# Altium PCB nRF53_Module.PcbDoc
Units mm, origin at the board's own origin, x right, y up, seen from the top; angles counter-clockwise.
Board outline 13.97 x 19.56 mm, 4 copper layers (Top Layer, Int1 (GND), Int2 (SIGN), Bottom Layer), stack 0.97 mm thick; 25 components, 66 nets, 202 pads, 80 vias.
Unrouted connection lines stored in the file: 1.
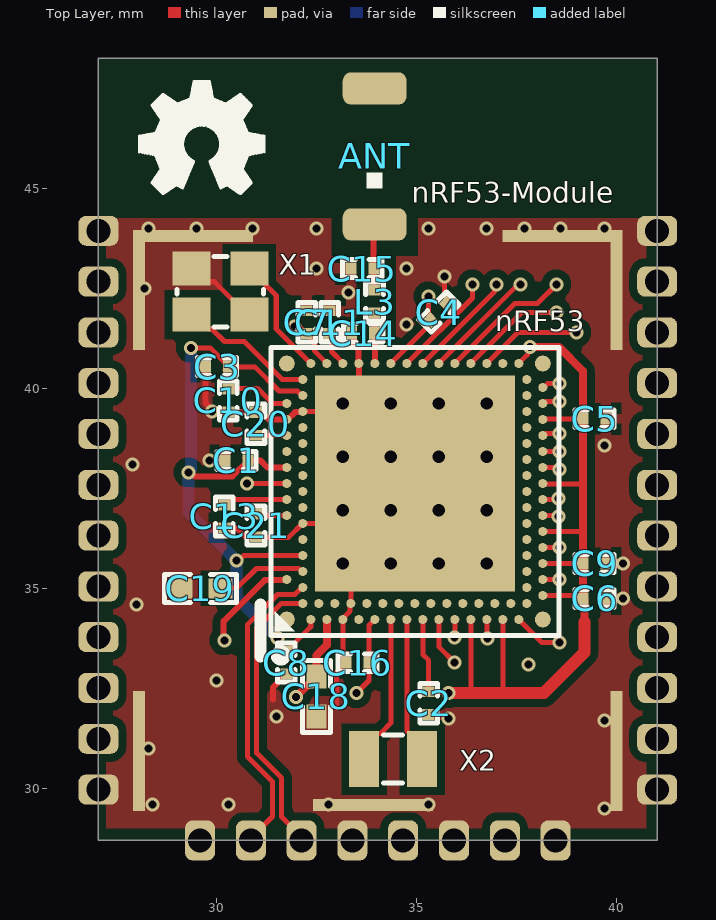
[diagram p0: Top Layer view]
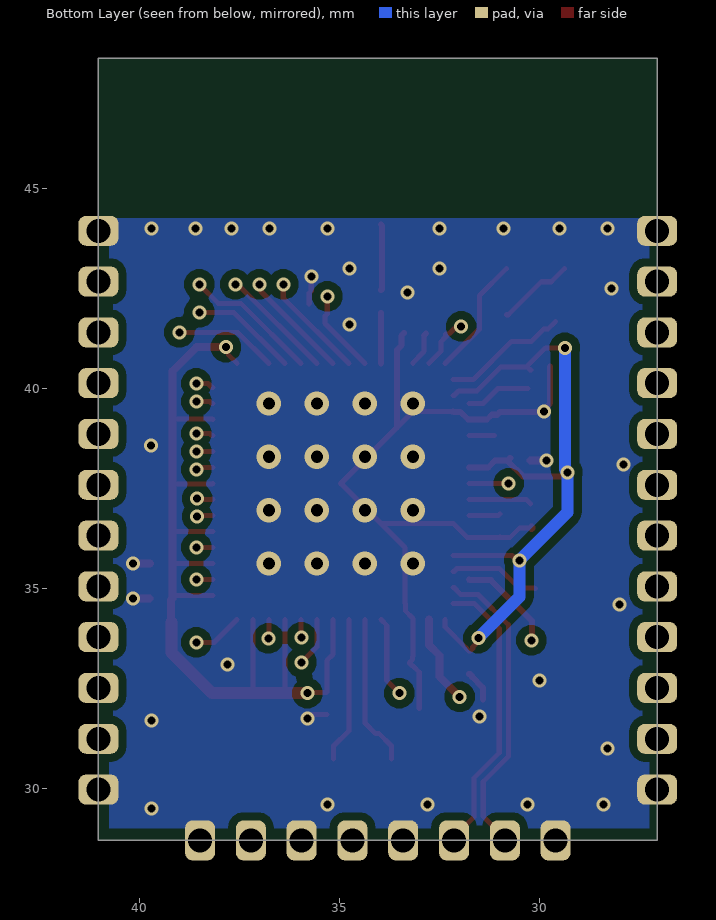
[diagram p1: Bottom Layer view, seen from below]
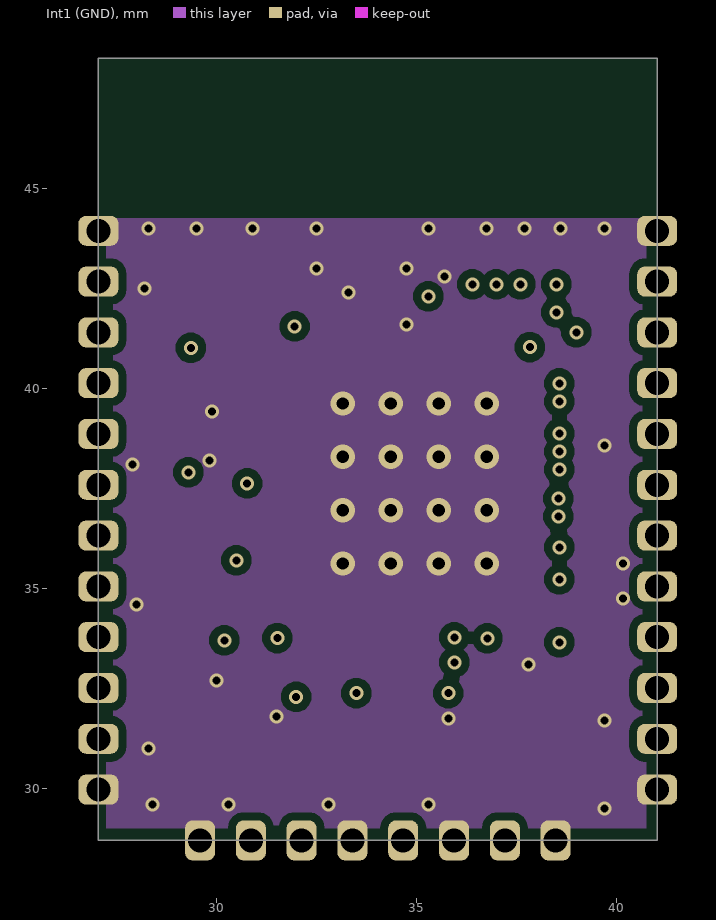
[diagram p2: Int1 (GND)]
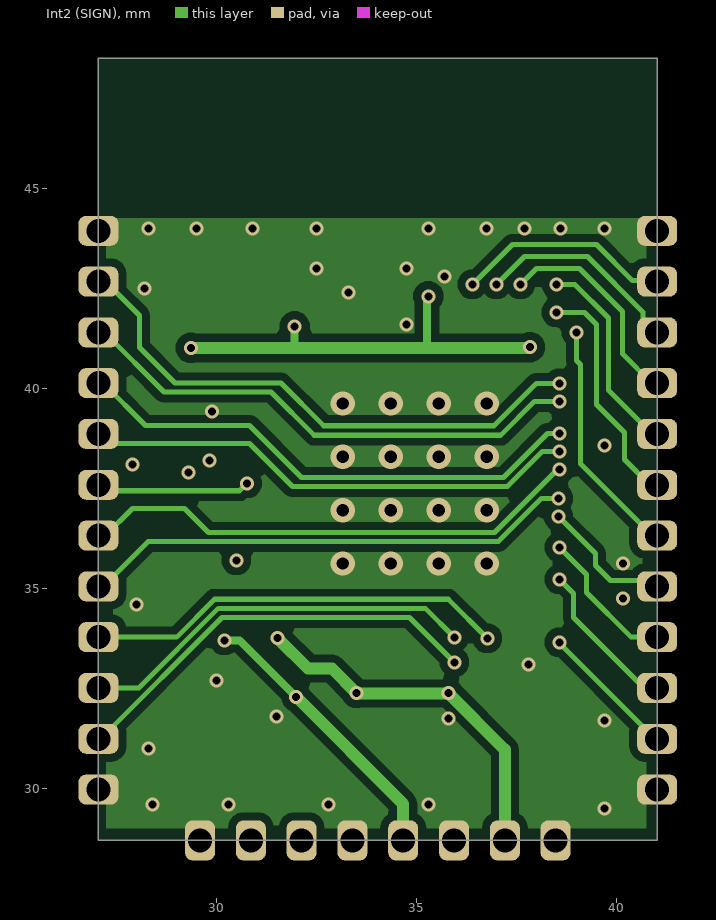
[diagram p3: Int2 (SIGN)]
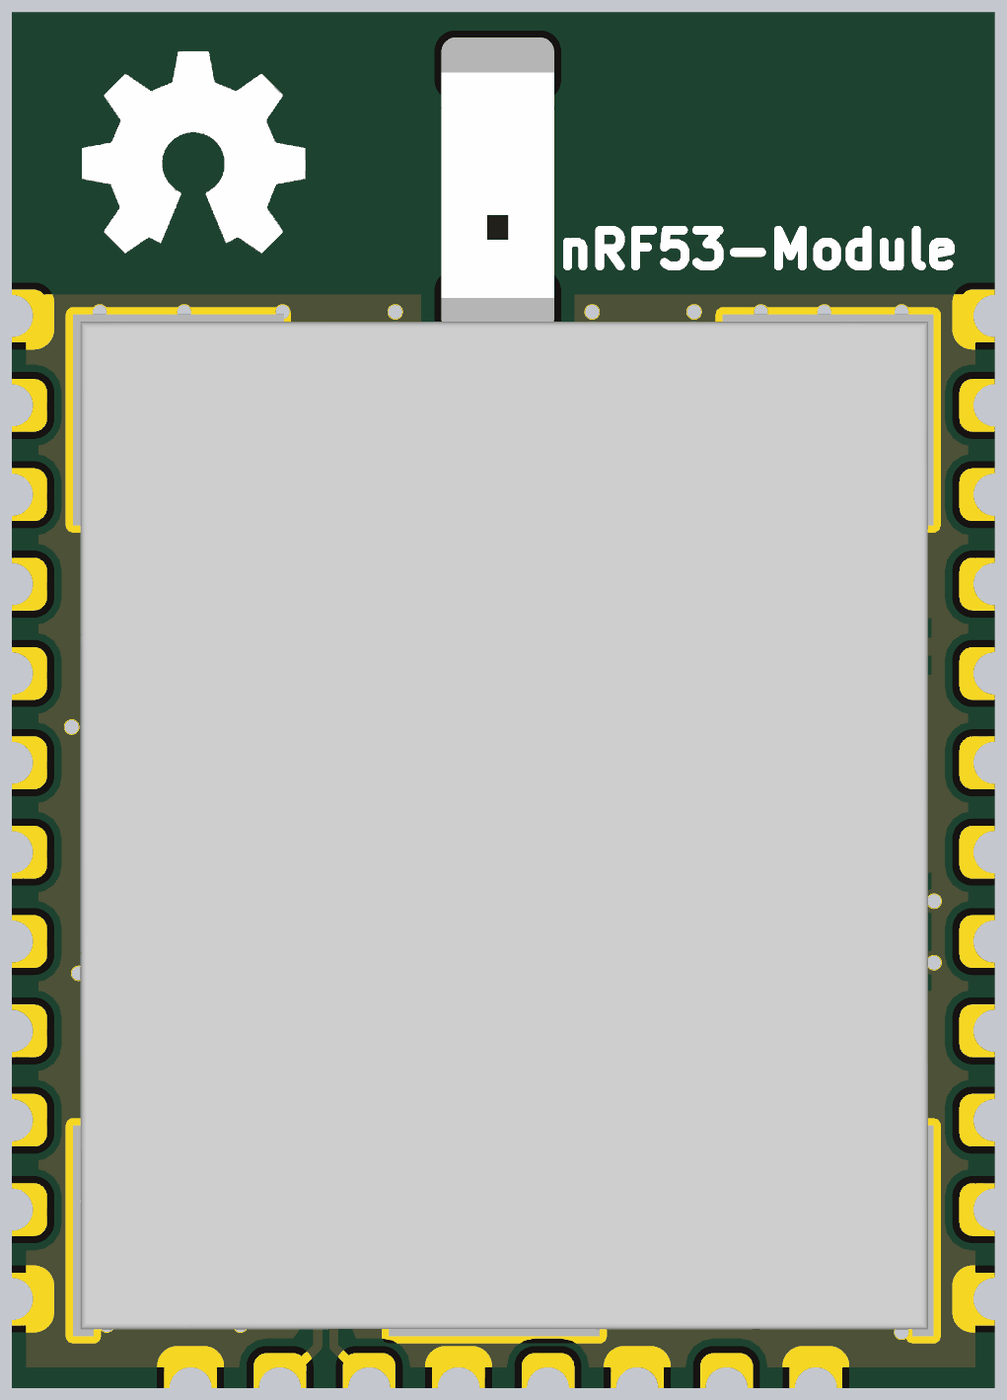
[diagram p4: 3D render of the assembled board from above, using the file's embedded part models]

## Layer stack, top to bottom
Top Solder: solder mask 0.0254, SM-001, Dk 4
Top Layer: signal copper 0.035
Dielectric 1: prepreg 0.1, PP-017, Dk 4.3
Int1 (GND): signal copper 0.0175
Dielectric 3: core 0.665, Core-039, Dk 4.8
Int2 (SIGN): signal copper 0.0175
Dielectric 5: prepreg 0.1, PP-017, Dk 4.3
Bottom Layer: signal copper 0.035
Bottom Solder: solder mask 0.0254, SM-001, Dk 4

## Board outline
27.051,28.702 41.021,28.702 41.021,48.26 27.051,48.26

## Design rules (kind name [scope] priority, off if disabled: settings)
Clearance poly [InPoly] p1: gap=0.2 ignorepadtopadclearanceinfootprint=TRUE
Clearance ALL [All] p2: gap=0.1 ignorepadtopadclearanceinfootprint=TRUE
ComponentClearance [All] p1 off: gap=0.254 collisioncheckmode=3 verticalgap=0.254 showdistances=FALSE
DiffPairsRouting [InDifferentialPair('DiffPair')] p1: maxlimit=0.254 minlimit=0.089 mostfreqgap=0.2 toplayer_minwidth=0.089 toplayer_maxwidth=0.381 toplayer_prefwidth=0.15 midlayer1_minwidth=0.089 midlayer1_maxwidth=0.381 midlayer1_prefwidth=0.15 midlayer2_minwidth=0.089 midlayer2_maxwidth=0.381 midlayer2_prefwidth=0.15 bottomlayer_minwidth=0.089 bottomlayer_maxwidth=0.381 bottomlayer_prefwidth=0.15 maxuncoupledlength=12.7
HoleSize [All] p1 off: absolutevalues=TRUE maxlimit=2.54 minlimit=0.025 maxpercent=80.000 minpercent=20.000
HoleToHoleClearance [All] p1: gap=0.254 allowstackedmicrovias=FALSE
MatchedLengths usb [InDifferentialPair('USB')] p1: tolerance=1 checknetsindiffpair=FALSE checkdiffpairvsdiffpair=TRUE checkxsignals=TRUE checkothers=TRUE
MinimumAnnularRing [IsVia] p1: minimumring=0.076
MinimumSolderMaskSliver [All] p1 off: minsoldermaskwidth=0.254
PlaneConnect [InNet('NetC11_2')] p1: planeconnectstyle=Direct reliefexpansion=0.508 reliefentries=4 reliefconductorwidth=0.254 reliefairgap=0.254
PolygonConnect 0201 [HasFootprint('C0201')] p1: connectstyle=Relief reliefconductorwidth=0.254 reliefentries=4 polygonreliefangle="90 Angle" airgapwidth=0.254
PolygonConnect [All] p2: connectstyle=Direct reliefconductorwidth=0.254 reliefentries=4 polygonreliefangle="90 Angle" airgapwidth=0.254
RoutingVias [All] p1: holewidth=0.2 width=0.4 viastyle="Through Hole" minholewidth=0.1 minwidth=0.2 maxholewidth=6.3 maxwidth=1.27
SilkToSilkClearance [All] p1 off: silktosilkclearance=0.254
SilkToSolderMaskClearance [IsPad] p1 off: minsilkscreentomaskgap=0.254 clearancetoexposedcopper=TRUE
SolderMaskExpansion via [isvia] p1: expansion=0.102 istentingtop=TRUE
SolderMaskExpansion [All] p2: expansion=0.102 istentingtop=FALSE
Width [All] p1: maxlimit=1 minlimit=0.081 preferedwidth=0.15
22 further rules are at their usual default settings.

## Classes and differential pairs
differential pair USB: +USB_P -USB_N

## Components (designator, comment, footprint, x,y, rotation, side; value= is the part's Value field where it differs from the comment)
ANT "AMCA31-2R450G-S1F-T3" AMCA31-2R450G-S1F-T3 33.958,44.1 r0 top locked value=2450AT18D0100
C1 "1uF" C0201 30.5,38.2 r0 top value=100pF
C2 "100nF" C0201 35.306,32.131 r90 top value=100pF
C3 "100nF" C0201 30.015,40.548 r0 top value=100pF
C4 "100nF" C0201 35.56,41.91 r225 top value=100pF
C5 "100nF" C0201 39.453,39.243 r180 top value=100pF
C6 "100nF" C0201 39.453,34.75 r180 top value=100pF
C7 "100nF" C0201 32.258,41.656 r270 top value=100pF
C8 "100nF" C0201 31.75,33.147 r90 top value=100pF
C9 "100nF" C0201 39.453,35.624 r180 top value=100pF
C10 "1uF" C0201 30.3,39.7 r90 top value=100pF
C11 "2.2nF" C0201 32.833,41.657 r270 top value=100pF
C13 "1uF" C0201 30.2,36.8 r90 top value=100pF
C14 "1.5pF" C0201 33.669,41.386 r0 top locked value=100pF
C15 "DNP" C0201 33.647,42.999 r0 top value=100pF
C16 "2.2uF" C0201 33.528,33.147 r0 top value=100pF
C18 "4.7uF" C0402 32.5,32.3 r90 top value=100pF
C19 "4.7uF" C0402 29.6,35 r0 top value=100pF
C20 "100nF" C0201 30.988,39.116 r270 top value=100pF
C21 "1uF" C0201 30.988,36.576 r90 top value=100pF
L3 "3.9nH" IND0201 33.954,42.17 r90 top locked value=120R/0.55A
nRF53 "nRF5340-QKAA" nRF5340 34.96,37.424 r90 top locked
nRF53-Module "nRF5340-Module" NRF53MODULE 27.051,32.512 r0 top locked
X1 "ABM11-32.000MHZ-D2X-T3" XTAL_2016 30.099,42.418 r180 top value=32MHz
X2 "ABS06-32.768KHZ-T" XTAL_2012 34.417,30.734 r180 top value=32.768kHz

## Footprints (in the part's own frame and the unit in brackets; to place one, negate y for a bottom-side part, rotate by r counter-clockwise, add the part's x,y. Pads: shape width x height; smd on the part's side, far side on the other; paste and mask are expansions set on the pad)
AMCA31-2R450G-S1F-T3 [mm] "Chip antenna 2.45Ghz"
  rrect50% 1.6x0.8 smd: 1(0,0) NC(0,3.4)
  silkscreen extent -0.2,0.9 0.2,1.3, body extent -0.8,0.1 0.8,3.3, height 1.4
C0201 [mm]
  rect 0.27x0.3 smd: 1(-0.285,0) 2(0.285,0)
  silkscreen extent -0.49,-0.22 0.49,0.22, body extent -0.3,-0.15 0.31,0.15, height 0.3
C0402 [mm]
  rect 0.6x0.5 smd: 1(-0.5,0) 2(0.5,0)
  silkscreen extent -0.9,-0.35 0.9,0.35, body extent -0.51,-0.25 0.51,0.25, height 0.5
IND0201 [mm]
  rect 0.27x0.3 smd: 1(-0.285,0) 2(0.285,0)
  silkscreen extent -0.49,-0.22 0.49,0.22, body extent -0.31,-0.16 0.31,0.16, height 0.26
NRF53MODULE [mm] "Module"
  rrect50% 1x0.75 hole 0.6: 1(0,11.43) 2(0,10.16) 3(0,8.89) 4(0,7.62) 5(0,6.35) 6(0,5.08) 7(0,3.81) 8(0,2.54) 9(0,1.27) 10(0,0) 11(0,-1.27) 12(0,-2.54) 13(13.97,-2.54) 14(13.97,-1.27) 15(13.97,0) 16(13.97,1.27) 17(13.97,2.54) 18(13.97,3.81) 19(13.97,5.08) 20(13.97,6.35) 21(13.97,7.62) 22(13.97,8.89) 23(13.97,10.16) 24(13.97,11.43)
  rect 0.3x3 smd: 1(1.016,-1.571) 1(1.016,9.953) 1(12.954,-1.571) 1(12.954,9.953)
  rect 3x0.3 smd: 1(2.366,11.303) 1(6.858,-2.921) 1(11.604,11.303)
  rrect50% 0.75x1 hole 0.6: 25(2.54,-3.81) 26(3.81,-3.81) 27(5.08,-3.81) 28(6.35,-3.81) 29(7.62,-3.81) 30(8.89,-3.81) 31(10.16,-3.81) 32(11.43,-3.81)
  body extent 0.97,-2.97 13.03,11.35, height 1
nRF5340 [mm] "Nordic Semiconductor"
  rect 5.4x5 smd paste-5 mask+0.05: 104(0.2,0)
  round 0.4 smd paste+0.012 mask+0.05: A1(-3.2,3.2) A31(3.2,3.2) AL1(-3.2,-3.2) AL31(3.2,-3.2)
  round 0.225 smd paste+0.012 mask+0.05: A5(-2.2,3.2) A13(-0.6,3.2) A15(-0.2,3.2) A17(0.2,3.2) A19(0.6,3.2) A21(1,3.2) A23(1.4,3.2) A25(1.8,3.2) A27(2.2,3.2) AA1(-3.2,-1) AA31(3.2,-1) AB2(-2.8,-1.2) AC1(-3.2,-1.4) AC31(3.2,-1.4) AD2(-2.8,-1.6) AE1(-3.2,-1.8) AE31(3.2,-1.8) AF2(-2.8,-2) AG1(-3.2,-2.2) AG31(3.2,-2.2) AH2(-2.8,-2.4) AJ1(-3.2,-2.6) AJ31(3.2,-2.6) AK2(-2.8,-2.8) AK4(-2.4,-2.8) AK6(-2,-2.8) AK8(-1.6,-2.8) AK10(-1.2,-2.8) AK12(-0.8,-2.8) AK14(-0.4,-2.8) AK16(0,-2.8) AK18(0.4,-2.8) AK20(0.8,-2.8) AK22(1.2,-2.8) AK24(1.6,-2.8) AK26(2,-2.8) AK28(2.4,-2.8) AK30(2.8,-2.8) AL3(-2.6,-3.2) AL5(-2.2,-3.2) AL7(-1.8,-3.2) AL9(-1.4,-3.2) AL11(-1,-3.2) AL13(-0.6,-3.2) AL15(-0.2,-3.2) AL17(0.2,-3.2) AL19(0.6,-3.2) AL21(1,-3.2) AL23(1.4,-3.2) AL25(1.8,-3.2) AL27(2.2,-3.2) AL29(2.6,-3.2) B2(-2.8,2.8) B4(-2.4,2.8) B6(-2,2.8) B8(-1.6,2.8) B10(-1.2,2.8) B12(-0.8,2.8) B14(-0.4,2.8) B16(0,2.8) B18(0.4,2.8) B20(0.8,2.8) B22(1.2,2.8) B24(1.6,2.8) B26(2,2.8) B28(2.4,2.8) B30(2.8,2.8) C1(-3.2,2.6) C31(3.2,2.6) D2(-2.8,2.4) E1(-3.2,2.2) E31(3.2,2.2) F2(-2.8,2) G1(-3.2,1.8) G31(3.2,1.8) H2(-2.8,1.6) J1(-3.2,1.4) J31(3.2,1.4) K2(-2.8,1.2) L1(-3.2,1) L31(3.2,1) M2(-2.8,0.8) N1(-3.2,0.6) N31(3.2,0.6) P2(-2.8,0.4) R1(-3.2,0.2) R31(3.2,0.2) T2(-2.8,0) U1(-3.2,-0.2) U31(3.2,-0.2) V2(-2.8,-0.4) W1(-3.2,-0.6) W31(3.2,-0.6) Y2(-2.8,-0.8)
  rrect50% 1.1x1 on Top Paste: ""(-1.75,-1.8) ""(-1.75,-0.6) ""(-1.75,0.6) ""(-1.75,1.8) ""(-0.45,1.8) ""(-0.45,-0.6) ""(-0.45,0.6) ""(-0.45,-1.8) ""(0.85,1.8) ""(0.85,-0.6) ""(0.85,0.6) ""(0.85,-1.8) ""(2.15,-1.8) ""(2.15,-0.6) ""(2.15,0.6) ""(2.15,1.8)
  silkscreen extent -4.22,-3.6 3.6,3.6, body extent -3.5,-3.5 3.5,3.5, height 0.85
XTAL_2012 [mm]
  rect 0.75x1.4 smd: 1(-0.725,0) 2(0.725,0)
  silkscreen extent -0.24,-0.6 0.24,0.6, body extent -1,-0.61 1,0.61, height 0.6
XTAL_2016 [mm]
  rect 0.95x0.85 smd: 1(-0.725,-0.575) 2(0.725,-0.575) 3(0.725,0.575) 4(-0.725,0.575)
  silkscreen extent -1.08,-0.88 1.08,0.88, body extent -1.05,-0.85 1.05,0.85, height 0.56

## Part data
ANT: library part "Antenna with GND", "2.45 GHz chip antenna", manufacturer="Johanson Technology", Manufacturer Part Number=2450AT18D0100, Part Number="Johanson 2450AT18D0100_STD-L", Part number IPS=N.A., Supplier Part Number 1=2450AT18D0100E, Artikkelnr Noca=53059035, ComponentLink1Description=Datasheet, ComponentLink2Description="Supplier link", Footprint Doc=2450AT18D0100, HelpURL=http://www.johansontechnology.com/datasheets/antennas/2450AT18D0100.pdf, LatestRevisionDate=2016-06-02, Pin Count=4, Published=2016-01-12, Publisher="Nordic Semiconductor", Supplier 1=Digi-Key, Supplier 2=Mouser, Supplier Part Number 2=609-2450AT18D0100E
C1 C2 C3 C4 C5 C6 C7 C8 C9 C10 C11 C13 C14 C15 C16 C18 C19 C20 C21: library part CAP, "Capacitor", Published=8-Jun-2000, Publisher="Altium Limited", Revision="July-2002: Re-released for DXP Platform."
L3: library part IND, "Inductor", manufacturer=Murata, Manufacturer Part Number=BLM15AG121SN1D, Part Number=FB0402-120R@100M-500mA, Part number IPS=N.A., Artikkelnr Noca=33029317, ComponentLink1Description=Datasheet, ComponentLink2Description="Supplier link", Footprint Doc=0402, HelpURL=http://search.murata.co.jp/Ceramy/image/img/PDF/ENG/L0110S0100BLM15A_SN.pdf, LatestRevisionDate=2014-01-10, Note="Chip EMIFIL Inductor Type Chip Ferrite Bead", Pin Count=2, Published=2011-11-14, Publisher="Nordic Semiconductor"
nRF53: library part nRF5340-QKAAAA, "Multi-protocol Bluetooth Low Energy, IEEE 802.15.4, ANT and 2.4GHz proprietary system-on-chip", manufacturer="Nordic Semiconductor", Part Number=nRF5340-QKAADA, Part number IPS=N.A., Artikkelnr Noca=N.A., ComponentLink1Description=Datasheet, ComponentLink2Description="Supplier link", Footprint Doc=AQFN-98, LatestRevisionDate=2019-03-28, Pin Count=98, Published=2017-01-09, Publisher="Nordic Semiconductor", Supplier 1="Nordic Semiconductor", Supplier Part Number 1=nRF5340-QKAADA
nRF53-Module: "nRF5340-Module Available on https://www.hackster.io/kattemjau"
X1: library part XTAL_SMD2016, "XTAL SMD 2016, 32MHz, Cl=8pF, Total Tol: ±40ppm", Part Number=XTAL_SMD2016_32MHz_8pF_General, Footprint Doc=XTAL_2016, LatestRevisionDate=2016-08-19, Pin Count=4, Published=2016-08-19, Publisher="Nordic Semiconductor"
X2: library part XTAL_2-pin, "XTAL SMD 32.768kHz, 9pF, ±20ppm", manufacturer=NDK, Manufacturer Part Number=NX3215SA-32.768K-STD-MUA-9, Part Number=XTAL_SMD3215_32.768kHz_9pF_NDK, Part number IPS=N.A., Supplier Part Number 1=535-11937-6-ND, Artikkelnr Noca=22010049, ComponentLink1Description=Datasheet, ComponentLink2Description="Supplier link", Footprint Doc=XTAL_3215, LatestRevisionDate=2017-10-23, Note="XTAL SMD 32.768kHz", Pin Count=2, Published=2017-10-23, Publisher="Nordic Semiconductor", Supplier 1=Digi-Key

## Via types
v1: diameter 0.35, hole 0.2, Top Layer to Bottom Layer, tented both sides, 64 vias
v2: diameter 0.61, hole 0.305, Top Layer to Bottom Layer, tented both sides, 16 vias

## Nets (pads, with @x,y where several pads share a name; then routed paths per layer and width w, separated by ;. In a path a pad name is that pad's centre, name@x,y a point inside that pad or via, vN(x,y) a via of type N, cw(c..) or ccw(c..) an arc to the next point about the centre after c; other vN are vias at no path point)
EPROM_CS: nRF53.AK14
GND: C1.1 C2.1 C3.1 C4.1 C5.1 C6.1 C7.1 C8.1 C9.1 C10.1 C11.1 C13.1 C14.1 C15.1 C16.1 C18.1 C19.1 C20.1 C21.1 nRF53-Module.1 nRF53-Module.12 nRF53-Module.13 nRF53-Module.24 nRF53-Module.25 nRF53-Module.28 nRF53-Module.30 nRF53-Module.32 nRF53.104 nRF53.A25 nRF53.B12 nRF53.B26 nRF53.G1 nRF53.H2 nRF53.J31 X1.2 X1.4 | length 25.3
  Top Layer w0.127: X1.2 29.699,42.668 29.949,42.668 30.774,41.843 X1.4 ; C13.1 30.491,36.515 30.729,36.278 C21.1@30.988,36.278 ; C21.1 31.001,36.278 31.806,36.278 32.152,36.624 nRF53.B12 nRF53.104@33.96,36.624 ; nRF53.B26 33.16,39.424 nRF53.104@33.56,39.024 ; 33,32 33,32.904 33.157,33.061 33.172,33.061 33.243,33.132 C16.1 33.172,33.219 33.172,33.296 33.16,33.308 nRF53.G1 33.16,34.25 33.341,34.431 33.341,34.605 nRF53.H2 33.36,36.024 nRF53.104@33.96,36.624 ; nRF53.104 nRF53.104@33.96,36.624 ; C2.1 35.651,31.846 35.747,31.75 v1(35.796,31.75) ; v1(35.7,42.8) 35.7,42.434 35.751,42.384 35.751,42.122 C4.1 ; nRF53-Module.30 nRF53-Module.30@35.941,28.827
  Top Layer w0.152: C3.1 29.73,39.633 29.885,39.477 v1(29.885,39.424) ; v1@29.835,39.424 29.844,39.415 C10.1 30.307,39.408 30.981,39.408 C20.1 ; C20.1@30.988,39.407 31.053,39.342 31.189,39.342 31.307,39.224 nRF53.A25 31.78,39.224 31.966,39.41 32.146,39.41 nRF53.B26 ; 31.41,32.222 31.41,32.522 31.676,32.788 31.676,32.803 31.735,32.862 C8.1 ; C14.1 33.443,41.327 33.443,41.075 33.554,40.965 33.554,40.63 nRF53.J31 33.56,39.024 nRF53.104
  Top Layer w0.2: v1(29.825,38.2) C1.1 ; C13.1@30.193,36.522 C13.1 ; C9.1 40.159,35.624 v1(40.16,35.625) ; C6.1@39.745,34.75 39.746,34.751 39.95,34.751
  other v1: 39.7,29.5 28.4,29.6 30.3,29.6 32.8,29.6 35.3,29.6 28.3,31 39.7,31.7 31.5,31.8 30,32.7 37.8,33.1 28,34.6 40.16,34.751 27.9,38.1 39.704,38.568 34.75,41.6 33.3,42.4 28.2,42.5 32.5,43 34.75,43 28.3,44 29.5,44 30.9,44 32.5,44 35.3,44 36.75,44 37.7,44 38.6,44 39.7,44
  other v2: 33.16,35.624 34.36,35.624 35.56,35.624 36.76,35.624 33.16,36.957 34.36,36.957 35.56,36.957 36.76,36.957 33.16,38.29 34.36,38.29 35.56,38.29 36.76,38.29 33.16,39.624 34.36,39.624 35.56,39.624 36.76,39.624
NetANT_1: ANT.1 C15.2 L3.2 | length 1.7
  Top Layer w0.15: L3.2 33.932,42.477 33.932,44.073 ANT.1
NetC10_2: C10.2 nRF53.A27 | length 1.6
  Top Layer w0.127: C10.2@30.28,40 31.032,40 31.409,39.624 nRF53.A27
NetC11_2: C11.2 nRF53.G31 | length 0.9
  Top Layer w0.127: C11.2@32.88,41.325 32.88,40.923 33.16,40.643 nRF53.G31
  Top Layer w0.152: C11.2 C11.2@32.88,41.325
NetC13_2: C13.2 nRF53.A15 | length 1.6
  Top Layer w0.127: C13.2@30.217,37.115 30.226,37.124 30.326,37.224 nRF53.A15
NetC14_2: C14.2 L3.1 nRF53.L31 | length 1.3
  Top Layer w0.15: C14.2 33.959,41.382 nRF53.L31 nRF53.L31 ; C14.2 L3.1
NetC19_2: C19.2 nRF53.B6 | length 2.3
  Top Layer w0.127: C19.2 30.116,35.016 30.516,35.016 31,35.5 32.057,35.5 32.133,35.424 nRF53.B6
NetC20_2: C20.2 nRF53.A23 | length 0.6
  Top Layer w0.127: C20.2@31.115,38.824 nRF53.A23
NetC21_2: C21.2 nRF53.A13 | length 0.8
  Top Layer w0.127: C21.2 31.025,36.824 nRF53.A13
NetnRF53_B30: nRF53.B30 X1.3 | length 3.2
  Top Layer w0.127: X1.3@29.591,41.676 29.786,41.481 29.892,41.481 30.203,41.171 30.698,41.171 31.646,40.224 nRF53.B30
NetnRF53_C31: nRF53.C31 X1.1 | length 3
  Top Layer w0.127: X1.1 31.496,42.321 31.496,41.488 nRF53.C31
NetnRF53_N1: nRF53.N1 X2.2 | length 3.8
  Top Layer w0.127: X2.2 33.692,31.059 34.004,31.371 34.094,31.371 34.36,31.636 nRF53.N1
NetnRF53_R1: nRF53.R1 X2.1 | length 3.6
  Top Layer w0.127: nRF53.R1 34.76,31.441 35.142,31.059 X2.1
P0.02: nRF53-Module.11 nRF53.W1 | length 11.9
  Top Layer w0.127: nRF53.W1 35.56,33.54 v1(35.95,33.15)
  Int2 (SIGN) w0.127: nRF53-Module.11 27.109,31.242 30.142,34.275 34.825,34.275 v1(35.95,33.15)
P0.03: nRF53-Module.10 nRF53.AA1 | length 10.5
  Top Layer w0.127: v1(35.95,33.775) 35.96,33.785 nRF53.AA1
  Int2 (SIGN) w0.127: nRF53-Module.10 28.058,32.512 30.048,34.502 35.223,34.502 v1(35.95,33.775)
P0.04: nRF53.V2
P0.05: nRF53.Y2
P0.06: nRF53.AB2
P0.07: nRF53.AD2
P0.08: nRF53.AH2
P0.09: nRF53-Module.14 nRF53.AJ1 | length 4.7
  Top Layer w0.127: nRF53.AJ1 38.134,33.65 v1(38.575,33.65)
  Int2 (SIGN) w0.127: v1(38.575,33.65) 38.575,33.63 40.963,31.242 nRF53-Module.14
P0.10: nRF53.AK2
P0.12: nRF53.AK6
P0.19: nRF53-Module.17 nRF53.AL13 | length 3.8
  Top Layer w0.127: nRF53.AL13 38.527,36.824 v1(38.552,36.799)
  Int2 (SIGN) w0.127: v1(38.552,36.799) 39.475,35.876 39.475,35.575 39.85,35.2 40.873,35.2 nRF53-Module.17
P0.20: nRF53.AK16
P0.21: nRF53-Module.8 nRF53.AL15 | length 12.8
  Top Layer w0.127: nRF53.AL15@38.167,37.231 nRF53.AL15 38.527,37.224 v1(38.552,37.249)
  Int2 (SIGN) w0.127: nRF53-Module.8 27.176,35.052 28.297,36.173 37.048,36.173 38.124,37.249 v1(38.552,37.249)
P0.22: nRF53.AK18
P0.23: nRF53.AK20
P0.24: nRF53-Module.3 nRF53.AL27 | length 13.4
  Top Layer w0.127: nRF53.AL27 38.187,39.624 38.237,39.674 v1(38.575,39.674)
  Int2 (SIGN) w0.127: nRF53-Module.3 27.198,41.402 28.689,39.911 31.364,39.911 32.444,38.831 37.106,38.831 37.949,39.674 v1(38.575,39.674)
P0.25: nRF53.AK28
P0.26: nRF53-Module.2 nRF53.AL29 | length 14.4
  Top Layer w0.127: nRF53.AL29 38.182,40.024 38.283,40.125 v1@38.574,40.125
  Int2 (SIGN) w0.127: nRF53-Module.2 27.228,42.672 28.075,41.825 28.075,41.025 28.962,40.138 31.612,40.138 32.682,39.068 36.943,39.068 37.999,40.124 v1(38.575,40.124)
P0.27: nRF53.AK30
P0.28: nRF53-Module.18 nRF53.AE31 | length 8.5
  Top Layer w0.127: nRF53.AE31 37.536,41.4 v1(39,41.4)
  Int2 (SIGN) w0.127: v1(39,41.4) 39,40.7 39.1,40.6 39.1,38.118 40.896,36.322 nRF53-Module.18
P0.29: nRF53-Module.22 nRF53.U31 | length 8
  Top Layer w0.127: nRF53.U31 36.957,42.421 36.957,42.557 v1(37,42.6)
  Int2 (SIGN) w0.127: v1(37,42.6) 37.7,43.3 39.275,43.3 40.661,41.914 40.661,41.704 40.963,41.402 nRF53-Module.22
P0.30: nRF53.B24
P0.31: nRF53.B22
P1.00: nRF53.M2
P1.01: nRF53.P2
P1.02: nRF53-Module.9 nRF53.AE1 | length 11
  Top Layer w0.127: nRF53.AE1 36.76,33.765 v1(36.775,33.75)
  Int2 (SIGN) w0.127: nRF53-Module.9 29.007,33.782 29.954,34.729 35.796,34.729 v1(36.775,33.75)
P1.03: nRF53.AF2
P1.04: nRF53-Module.7 nRF53.AL19 | length 13.1
  Top Layer w0.127: nRF53.AL19 38.465,38.024 38.515,37.974 v1(38.575,37.974)
  Int2 (SIGN) w0.127: nRF53-Module.7 27.222,36.322 27.9,37 29.2,37 29.8,36.4 36.954,36.4 38.528,37.974 v1(38.575,37.974)
P1.05: nRF53.AK22
P1.06: nRF53-Module.5 nRF53.AL21 | length 12.8
  Top Layer w0.127: nRF53.AL21 v1(38.575,38.424)
  Int2 (SIGN) w0.127: nRF53-Module.5 27.286,38.627 27.56,38.627 27.562,38.625 30.825,38.625 31.902,37.548 37.273,37.548 38.149,38.424 v1(38.575,38.424)
P1.07: nRF53.AK24
P1.08: nRF53-Module.4 nRF53.AL23 | length 13.4
  Top Layer w0.127: nRF53.AL23 38.187,38.824 38.238,38.875 v1@38.573,38.875
  Int2 (SIGN) w0.127: nRF53-Module.4 27.168,40.132 28.225,39.075 30.825,39.075 32.125,37.775 37.179,37.775 38.278,38.874 v1(38.575,38.874)
P1.09: nRF53.AK26
P1.10: nRF53-Module.23 nRF53.R31 | length 8.1
  Top Layer w0.127: nRF53.R31 36.4,42.264 v1(36.4,42.6)
  Int2 (SIGN) w0.127: v1(36.4,42.6) 37.4,43.6 39.5,43.6 40.405,42.695 40.998,42.695 nRF53-Module.23
P1.11: nRF53.B20
P1.12: nRF53.B18
P1.13: nRF53-Module.6 nRF53.A17 | length 4.8
  Top Layer w0.127: v1(30.765,37.624) nRF53.A17
  Int2 (SIGN) w0.127: nRF53-Module.6 27.2,37.443 30.579,37.443 30.76,37.624 v1(30.765,37.624)
P1.14: nRF53.B16
P1.15: nRF53.B14
QSPI_DATA0: nRF53-Module.15 nRF53.AL5 | length 4.4
  Top Layer w0.127: nRF53.AL5 38.649,35.224 v1@38.65,35.225
  Int2 (SIGN) w0.127: v1(38.575,35.225) 38.925,34.875 38.925,34.275 40.688,32.512 nRF53-Module.15
QSPI_DATA1: nRF53.AK8
QSPI_DATA2: nRF53.AK10
QSPI_DATA3: nRF53-Module.16 nRF53.AL9 | length 4.1
  Top Layer w0.127: nRF53.AL9 38.599,36.024 v1@38.6,36.025
  Int2 (SIGN) w0.127: v1(38.575,36.025) 39.25,35.35 39.25,34.9 40.368,33.782 nRF53-Module.16
QSPI_SCK: nRF53.AK12
RESET: nRF53-Module.19 nRF53.AC31 | length 8.5
  Top Layer w0.127: nRF53.AC31 37.636,41.9 v1(38.5,41.9)
  Int2 (SIGN) w0.127: v1(38.5,41.9) 39.2,41.9 39.5,41.6 39.5,39.6 40.2,38.9 40.2,38.221 40.829,37.592 nRF53-Module.19
SWDCLK: nRF53-Module.21 nRF53.W31 | length 8.3
  Top Layer w0.127: nRF53.W31 37.494,42.557 37.543,42.557 v1@37.6,42.5
  Int2 (SIGN) w0.127: v1(37.6,42.6) 38,43 39.079,43 40.153,41.926 40.153,40.865 40.886,40.132 nRF53-Module.21
SWDIO: nRF53-Module.20 nRF53.AA31 | length 8.5
  Top Layer w0.127: nRF53.AA31 37.463,42.127 38.027,42.127 v1(38.5,42.6)
  Int2 (SIGN) w0.127: v1(38.5,42.6) 38.96,42.6 39.8,41.76 39.8,39.956 40.894,38.862 nRF53-Module.20
SWO: nRF53.AK4
USB_N: nRF53-Module.26 nRF53.B4 | length 7.6
  Top Layer w0.127: nRF53-Module.26 30.861,28.76 31.4,29.299 31.4,30.17 30.773,30.797 30.773,34.094 31.53,34.851 31.96,34.851 32.133,35.024 nRF53.B4
USB_P: nRF53-Module.27 nRF53.B2 | length 7.2
  Top Layer w0.127: nRF53-Module.27 32.131,28.789 31.627,29.293 31.627,30.264 31,30.891 31,34 31.624,34.624 nRF53.B2
VDD_nRF: C1.2 C2.2 C3.2 C4.2 C5.2 C6.2 C7.2 C8.2 C9.2 C16.2 nRF53-Module.31 nRF53.A19 nRF53.AC1 nRF53.AG1 nRF53.AJ31 nRF53.AL3 nRF53.AL7 nRF53.AL11 nRF53.AL17 nRF53.AL25 nRF53.B8 nRF53.B28 nRF53.C1 nRF53.E31 nRF53.L1 nRF53.N31 nRF53.U1 | length 66.1
  Top Layer w0.127: v1(29.361,41.016) 29.847,41.016 30.3,40.563 C3.2 C3.2@30.3,40.533 ; C3.2@30.214,40.461 30.228,40.461 C3.2@30.3,40.533 ; v1(30.5,35.7) 30.56,35.7 30.684,35.824 nRF53.B8 ; v1(31.525,33.761) 31.567,33.718 31.567,33.63 31.664,33.533 31.664,33.503 31.735,33.432 C8.2 31.765,33.432 31.824,33.491 31.824,33.506 32.359,34.041 32.359,34.222 nRF53.C1 ; C7.2@32.118,41.496 32.243,41.371 C7.2 32.344,41.355 32.29,41.339 32.33,41.3 32.459,41.17 32.459,40.933 32.76,40.632 nRF53.E31 ; nRF53.B28 32.133,39.824 32.02,39.937 31.564,39.937 30.968,40.533 C3.2@30.3,40.533 ; v1(33.5,32.385) 33.813,32.698 C16.2 33.813,34.077 nRF53.L1 ; nRF53.N31 35.358,41.622 35.358,41.81 35.3,41.868 v1(35.3,42.3) ; nRF53.U1 35.16,33.349 35.306,33.203 C2.2 35.321,32.4 35.781,32.4 v1(35.796,32.385) ; 36.36,32.385 nRF53.AC1 ; 37.16,32.385 nRF53.AG1 ; nRF53.AJ31 37.56,40.627 37.773,40.839 ; nRF53.AL3 39.095,34.824 C6.2 ; nRF53.AL7 C9.2@39.063,35.624 ; nRF53.AL11 39.161,36.424 39.168,36.431 ; nRF53.AL17 38.172,37.611 39.167,37.611 39.168,37.613 ; nRF53.AL25 38.17,39.233 C5.2@39.034,39.233
  Top Layer w0.152: v1(29.3,37.9) 29.353,37.9 29.453,37.8 30.4,37.8 30.785,38.185 C1.2 ; C1.2@30.726,38.259 C1.2 ; nRF53.A19 31.276,38.024 31.1,38.2 C1.2
  Top Layer w0.2: v1(37.834,41.036) 38.564,41.036 39.168,40.432 C5.2 39.168,37.613 39.168,36.431 C9.2 C6.2 39.203,34.715 39.203,34.168
  Top Layer w0.3: v1(35.796,32.385) 36.36,32.385 37.16,32.385 38.185,32.385 39.2,33.4 39.2,34.165
  Int2 (SIGN) w0.2: 31.954,41.016 v1(31.954,41.549) ; 35.261,41.016 35.261,42.155 35.271,42.165 35.271,42.271 v1(35.3,42.3)
  Int2 (SIGN) w0.3: v1@29.374,41.016 31.954,41.016 35.261,41.016 37.779,41.016 37.79,41.026 37.825,41.026 v1(37.834,41.036) ; v1(31.525,33.761) 32.293,32.993 32.892,32.993 v1(33.5,32.385) ; v1@33.514,32.375 v1@35.787,32.375 ; v1(35.796,32.385) 37.211,30.97 nRF53-Module.31
  Bottom Layer w0.3: v1@29.361,41.002 29.361,37.974 29.3,37.914 v1(29.3,37.9) 29.3,36.9 v1(30.5,35.7) 30.5,34.786 v1(31.525,33.761)
VIN: C18.2 nRF53-Module.29 nRF53.A5 nRF53.E1 | length 11.8
  Top Layer w0.152: v1(30.2,33.7) 30.18,33.72 30.18,34.18 31.21,35.21 31.746,35.21 nRF53.A5
  Top Layer w0.2: v1(31.993,32.29) 32.5,32.797 C18.2 32.5,33 32.5,33.128 32.5,33.328 32.76,33.588 nRF53.E1
  Int2 (SIGN) w0.2: v1(30.2,33.7) 30.583,33.7 v1(31.993,32.29)
  Int2 (SIGN) w0.3: v1(31.993,32.29) 34.671,29.612 nRF53-Module.29
pads on no net: ANT.NC nRF53. nRF53.A1 nRF53.A21 nRF53.A31 nRF53.AG31 nRF53.AL1 nRF53.AL31 nRF53.B10 nRF53.D2 nRF53.F2 nRF53.J1 nRF53.K2 nRF53.T2

## Polygon pours and split planes (outlines as drawn)
GND on Int2 (SIGN) "NONET_L-01_P-001" (solid, pour order 0): 27.25,29 27.25,44.25 40.75,44.25 40.75,29
GND on Bottom Layer "NONET_L-01_P-001" (solid, pour order 1): 27.25,29 27.25,44.25 40.75,44.25 40.75,29
GND on Int1 (GND) "NONET_L-01_P-001" (solid, pour order 3): 27.25,29 27.25,44.25 40.75,44.25 40.75,29
GND on Top Layer "NONET_L-01_P-001" (solid, pour order 2): 27.25,29 27.25,44.25 40.75,44.25 40.75,29

## Other copper
Top Layer:
  pour cut-out: 31.5,41 38.5,41 38.52,40.98 38.52,33.925 31.575,33.925 31.5,34
  pour cut-out: 33.782,40.386 33.782,40.767 33.5,41.049 33.5,43.307 32.871,43.307 32.871,44.577 35.052,44.577 35.052,43.307 34.5,43.307 34.5,40.977 34.147,40.624 34.163,40.607 34.163,40.386
  pour cut-out: 27.051,48.26 41.021,48.26 41.021,44.323 27.051,44.323

## Silkscreen, mask and mechanical layers (free items; w line width, h text height)
Top Overlay:
  drawing of 2 lines, arcs and shapes, not listed
Mechanical 1:
  text "JLC stackup nr2 1mm thick" at 28.5,45.7 h1

## Dimensions
41.021,43.942 to 41.021,42.672 on Mechanical 1
41.021,48.26 to 41.021,28.702 on Mechanical 1
27.051,46.291 to 41.021,46.291 on Mechanical 1

## Text inside footprints (layer, text, board x,y; h text height)
nRF53: Mechanical 5 "AG1" at 37.2,33.883 h0.51 r90; Mechanical 5 "AJ1" at 37.6,33.883 h0.51 r90; Mechanical 5 "AH2" at 37.4,34.216 h0.51 r90; Mechanical 5 "AK4" at 37.999,34.915 h0.51 r90; Mechanical 5 "AL5" at 38.399,35.109 h0.51 r90; Mechanical 5 "AK2" at 37.973,34.515 h0.51 r90; Mechanical 5 "AL3" at 38.399,34.709 h0.51 r90; Mechanical 5 "V2" at 35.4,34.296 h0.51 r90; Mechanical 5 "U1" at 35.2,33.955 h0.51 r90; Mechanical 5 "Y2" at 35.8,34.296 h0.51 r90; Mechanical 5 "AA1" at 36,33.889 h0.51 r90; Mechanical 5 "W1" at 35.6,33.955 h0.51 r90; Mechanical 5 "AD2" at 36.6,34.216 h0.51 r90; Mechanical 5 "AC1" at 36.4,33.883 h0.51 r90; Mechanical 5 "AE1" at 36.8,33.903 h0.51 r90; Mechanical 5 "AB2" at 36.2,34.216 h0.51 r90; Mechanical 5 "H2" at 33.4,34.296 h0.51 r90; Mechanical 5 "J1" at 33.6,33.955 h0.51 r90; Mechanical 5 "G1" at 33.2,33.955 h0.51 r90; Mechanical 5 "M2" at 34.2,34.296 h0.51 r90; Mechanical 5 "L1" at 34,33.935 h0.51 r90; Mechanical 5 "P2" at 34.6,34.296 h0.51 r90; Mechanical 5 "R1" at 34.8,33.968 h0.51 r90; Mechanical 5 "N1" at 34.4,33.974 h0.51 r90; Mechanical 5 "K2" at 33.8,34.296 h0.51 r90; Mechanical 5 "D2" at 32.6,34.296 h0.51 r90; Mechanical 5 "E1" at 32.8,33.974 h0.51 r90; Mechanical 5 "C1" at 32.4,33.955 h0.51 r90; Mechanical 5 "B4" at 31.999,34.955 h0.51 r90; Mechanical 5 "A5" at 31.599,35.151 h0.51 r90; Mechanical 5 "B2" at 32.013,34.571 h0.51 r90; Mechanical 5 "AK14" at 37.999,36.886 h0.51 r90; Mechanical 5 "AL13" at 38.399,36.679 h0.51 r90; Mechanical 5 "AK10" at 38,36.086 h0.51 r90; Mechanical 5 "AL11" at 38.399,36.279 h0.51 r90; Mechanical 5 "AK12" at 37.999,36.486 h0.51 r90; Mechanical 5 "AK8" at 37.999,35.715 h0.51 r90; Mechanical 5 "AL7" at 38.399,35.509 h0.51 r90; Mechanical 5 "AL9" at 38.399,35.879 h0.51 r90; Mechanical 5 "AL15" at 38.399,37.079 h0.51 r90; Mechanical 5 "B14" at 31.999,36.925 h0.51 r90; Mechanical 5 "A13" at 31.6,36.722 h0.51 r90; Mechanical 5 "B10" at 31.999,36.125 h0.51 r90; Mechanical 5 "B12" at 31.999,36.525 h0.51 r90; Mechanical 5 "B8" at 31.999,35.755 h0.51 r90; Mechanical 5 "A15" at 31.599,37.122 h0.51 r90; Mechanical 5 "AK24" at 37.999,38.886 h0.51 r90; Mechanical 5 "AL23" at 38.399,38.679 h0.51 r90; Mechanical 5 "AL25" at 38.399,39.079 h0.51 r90; Mechanical 5 "AK20" at 38,38.086 h0.51 r90; Mechanical 5 "AL21" at 38.399,38.279 h0.51 r90; Mechanical 5 "AK18" at 37.999,37.686 h0.51 r90; Mechanical 5 "AL17" at 38.399,37.479 h0.51 r90; Mechanical 5 "AL19" at 38.399,37.879 h0.51 r90; Mechanical 5 "AK22" at 37.999,38.486 h0.51 r90; Mechanical 5 "B24" at 31.999,38.925 h0.51 r90; Mechanical 5 "A23" at 31.6,38.722 h0.51 r90; Mechanical 5 "A25" at 31.599,39.122 h0.51 r90; Mechanical 5 "B20" at 31.999,38.125 h0.51 r90; Mechanical 5 "A21" at 31.6,38.322 h0.51 r90; Mechanical 5 "B18" at 31.999,37.725 h0.51 r90; Mechanical 5 "A17" at 31.599,37.522 h0.51 r90; Mechanical 5 "A19" at 31.599,37.922 h0.51 r90; Mechanical 5 "B22" at 31.999,38.525 h0.51 r90; Mechanical 5 "AL29" at 38.399,39.879 h0.51 r90; Mechanical 5 "AL27" at 38.399,39.479 h0.51 r90; Mechanical 5 "AK28" at 37.999,39.686 h0.51 r90; Mechanical 5 "AG31" at 37.2,40.746 h0.51 r90; Mechanical 5 "AJ31" at 37.6,40.746 h0.51 r90; Mechanical 5 "AK30" at 37.999,40.086 h0.51 r90; Mechanical 5 "U31" at 35.2,40.746 h0.51 r90; Mechanical 5 "AA31" at 36,40.746 h0.51 r90; Mechanical 5 "W31" at 35.6,40.746 h0.51 r90; Mechanical 5 "AC31" at 36.4,40.746 h0.51 r90; Mechanical 5 "AE31" at 36.8,40.746 h0.51 r90; Mechanical 5 "J31" at 33.6,40.746 h0.51 r90; Mechanical 5 "G31" at 33.2,40.746 h0.51 r90; Mechanical 5 "L31" at 34,40.746 h0.51 r90; Mechanical 5 "R31" at 34.8,40.746 h0.51 r90; Mechanical 5 "N31" at 34.4,40.746 h0.51 r90; Mechanical 5 "E31" at 32.8,40.746 h0.51 r90; Mechanical 5 "C31" at 32.4,40.746 h0.51 r90; Mechanical 5 "B30" at 31.999,40.125 h0.51 r90; Mechanical 5 "A27" at 31.599,39.522 h0.51 r90; Mechanical 5 "B28" at 31.999,39.725 h0.51 r90; Mechanical 5 "AF2" at 37,34.216 h0.51 r90; Mechanical 5 "F2" at 33,34.296 h0.51 r90; Mechanical 5 "T2" at 35,34.296 h0.51 r90; Mechanical 5 "AK6" at 37.999,35.315 h0.51 r90; Mechanical 5 "B6" at 31.999,35.355 h0.51 r90; Mechanical 5 "AK26" at 37.999,39.286 h0.51 r90; Mechanical 5 "AK16" at 37.999,37.286 h0.51 r90; Mechanical 5 "B26" at 31.999,39.325 h0.51 r90; Mechanical 5 "B16" at 31.999,37.325 h0.51 r90